# EAGLE board JetRacer4AntennasSupport_partsRev1 (EAGLE 9.6.0)

Size 165.12 x 32.4 mm. Coordinates in mm from the lower left corner, seen from the top.
Outline: 21.43,26.97 arc90 18.08,30.37 arc59 15.43,28.87 15.43,25.07 arc59 18.08,23.62 arc90 21.43,26.97
Outline: 21.76,31.2 48.46,17 116.66,17 143.36,31.2 145.36,32.2 arc-5 146.06,32.4 161.76,32.4 arc-59 163.96,31.2 arc-16 164.66,29.9 165.06,27.9 arc-27 164.76,24.8 arc-6 164.36,24.1 arc-13 161.76,21.5 147.96,21.5 124.06,0 41.06,0 17.16,21.5 3.36,21.5 arc-13 0.76,24.1 arc-6 0.36,24.8 arc-27 0.06,27.9 0.46,29.9 arc-16 1.16,31.2 arc-59 3.36,32.4 19.06,32.4 arc-5 19.76,32.2 21.76,31.2
Outline: 8.43,26.97 arc90 5.08,30.37 arc59 2.43,28.87 2.43,25.07 arc59 5.08,23.62 arc90 8.43,26.97
Outline: 143.69,26.97 arc-90 147.04,30.37 arc-59 149.69,28.87 149.69,25.07 arc-59 147.04,23.62 arc-90 143.69,26.97
Outline: 156.69,26.97 arc-90 160.04,30.37 arc-59 162.69,28.87 162.69,25.07 arc-59 160.04,23.62 arc-90 156.69,26.97
Copper layers (1*16): Top 0.035mm / dielectric 1.5mm / Bottom 0.035mm
Design rules "SeeedStudio_2layer_DRU_no_angle_20140221": minimum track width 6mil, minimum drill 12mil, track to track 6mil, track to pad 6mil, pad to pad 6mil, via to via 6mil, smd to smd 0mil, copper to edge 10mil, drill to drill 10mil, minimum pad ring 10mil, minimum via ring 6mil, stop-mask expansion 2mil, vias tented up to drill 100mil, thermal gap 10mil
Holes 3.6 mm at 60.56,3.5 60.56,13.5 104.56,3.5 104.56,13.5

## Placement (x,y rotation side)
E$1  [LOGO_FABO_L]  82.4,5.73 0 top

## Library data of the parts
E$1 = FaBo-Logo

## Text on the board
tPlace: JR-4AS | Rev1 | TOP
bPlace: BOTTOM
tDocu: UPPER PANEL LINE | 長径 6.7mm / 短径 5.7mm *4 | Φ3.6mm*4 | JETSON NANO LINE | JETSON NANO SPECER | JetRacer4AntennasSupport_partsRev1
bDocu: UPPER PANEL LINE